# Altium PCB LDOTEST.PcbDoc
Units mil, origin at the board's own origin, x right, y up, seen from the top; angles counter-clockwise.
Board outline 6000 x 4000 mil, 2 copper layers (Top Layer, Bottom Layer); 44 components, 18 nets, 141 pads, 32 vias.
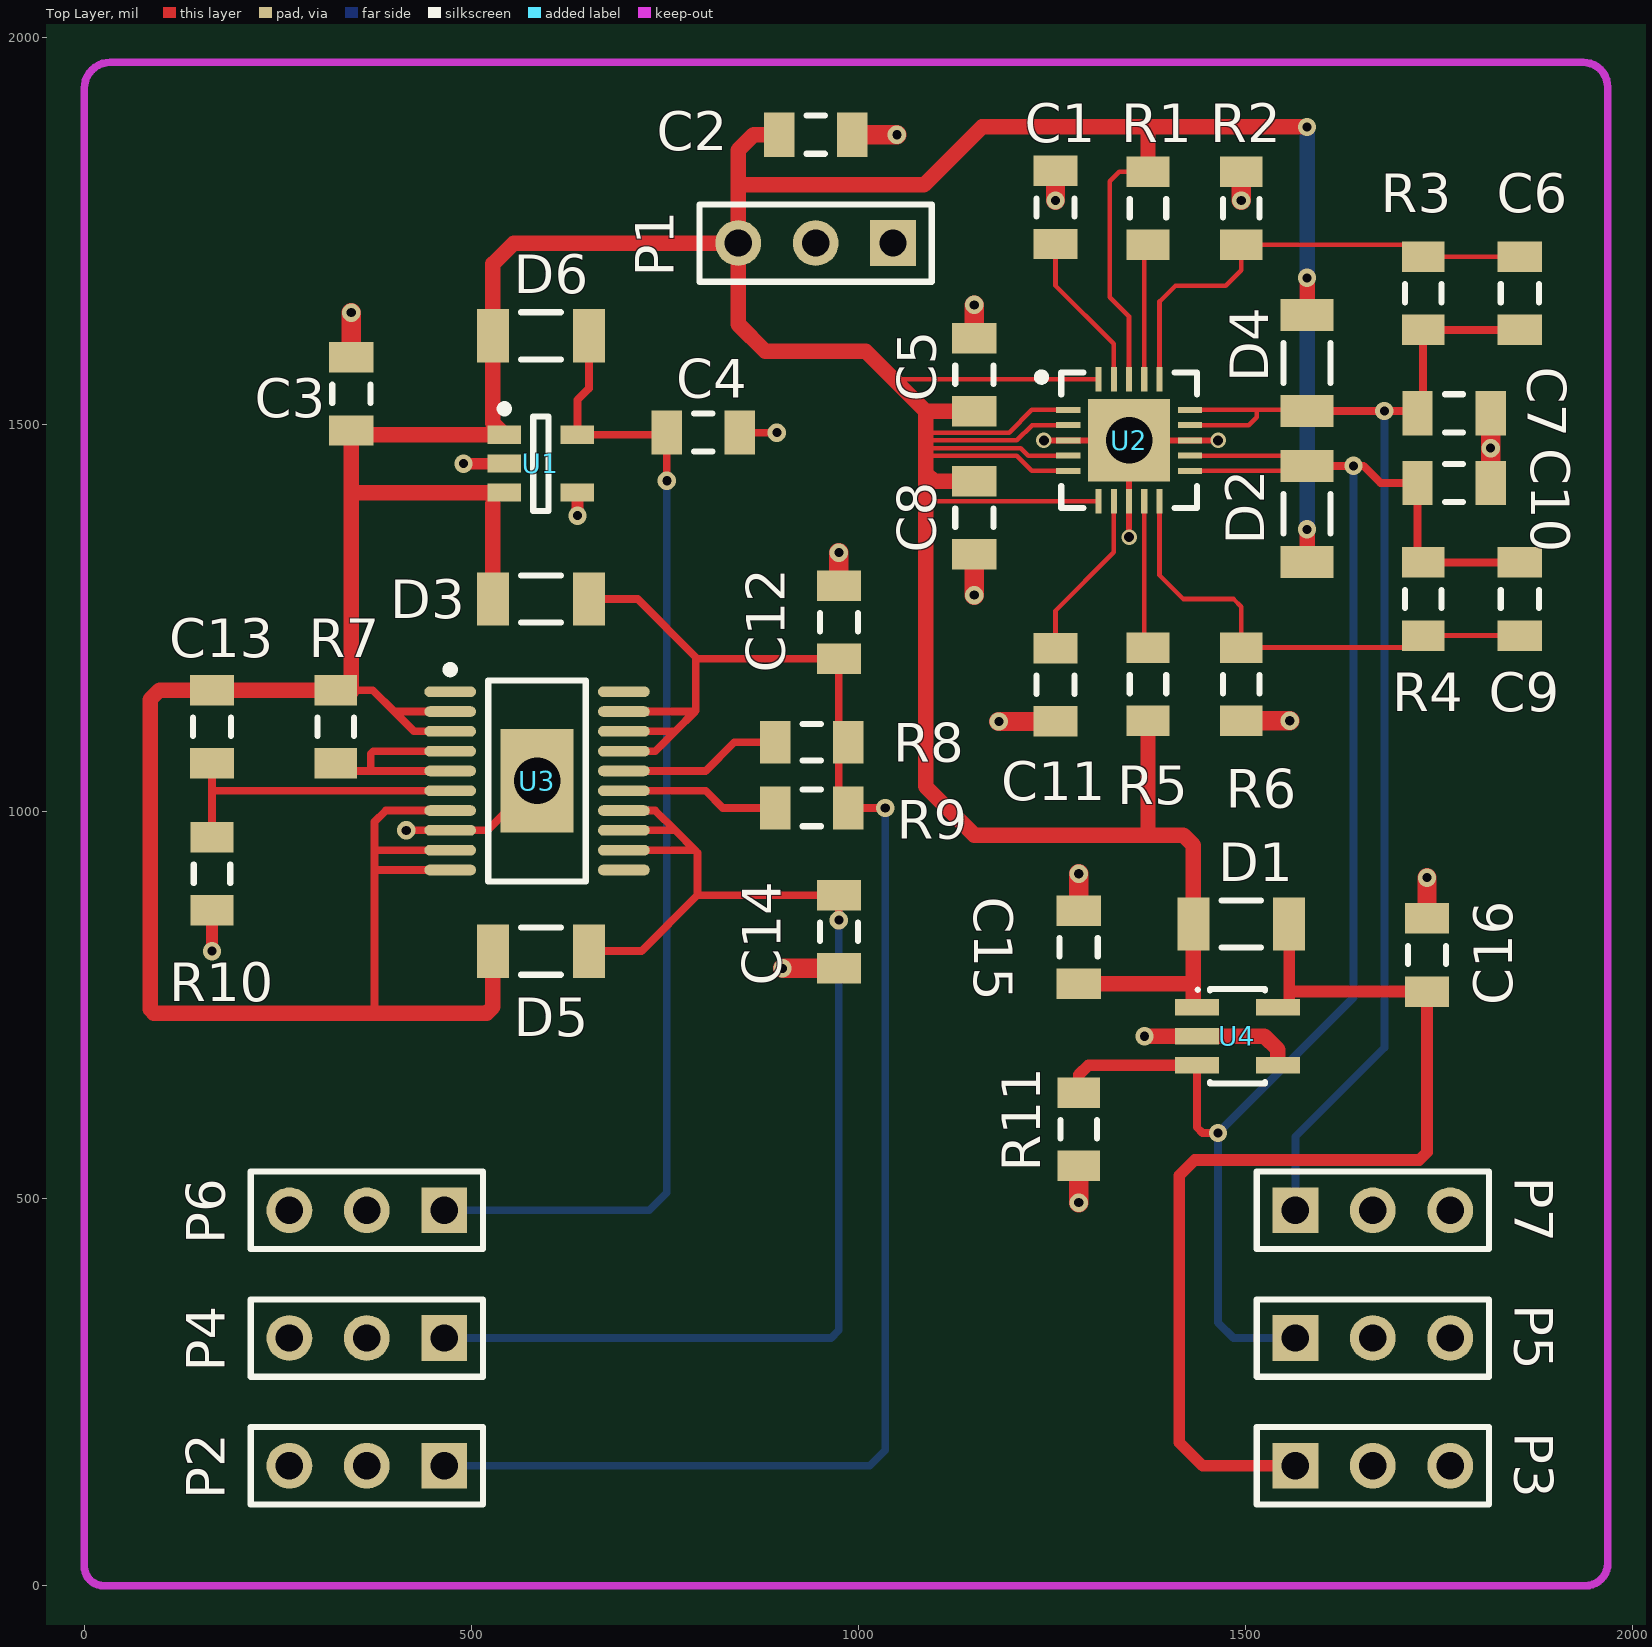
[diagram p0: Top Layer view]
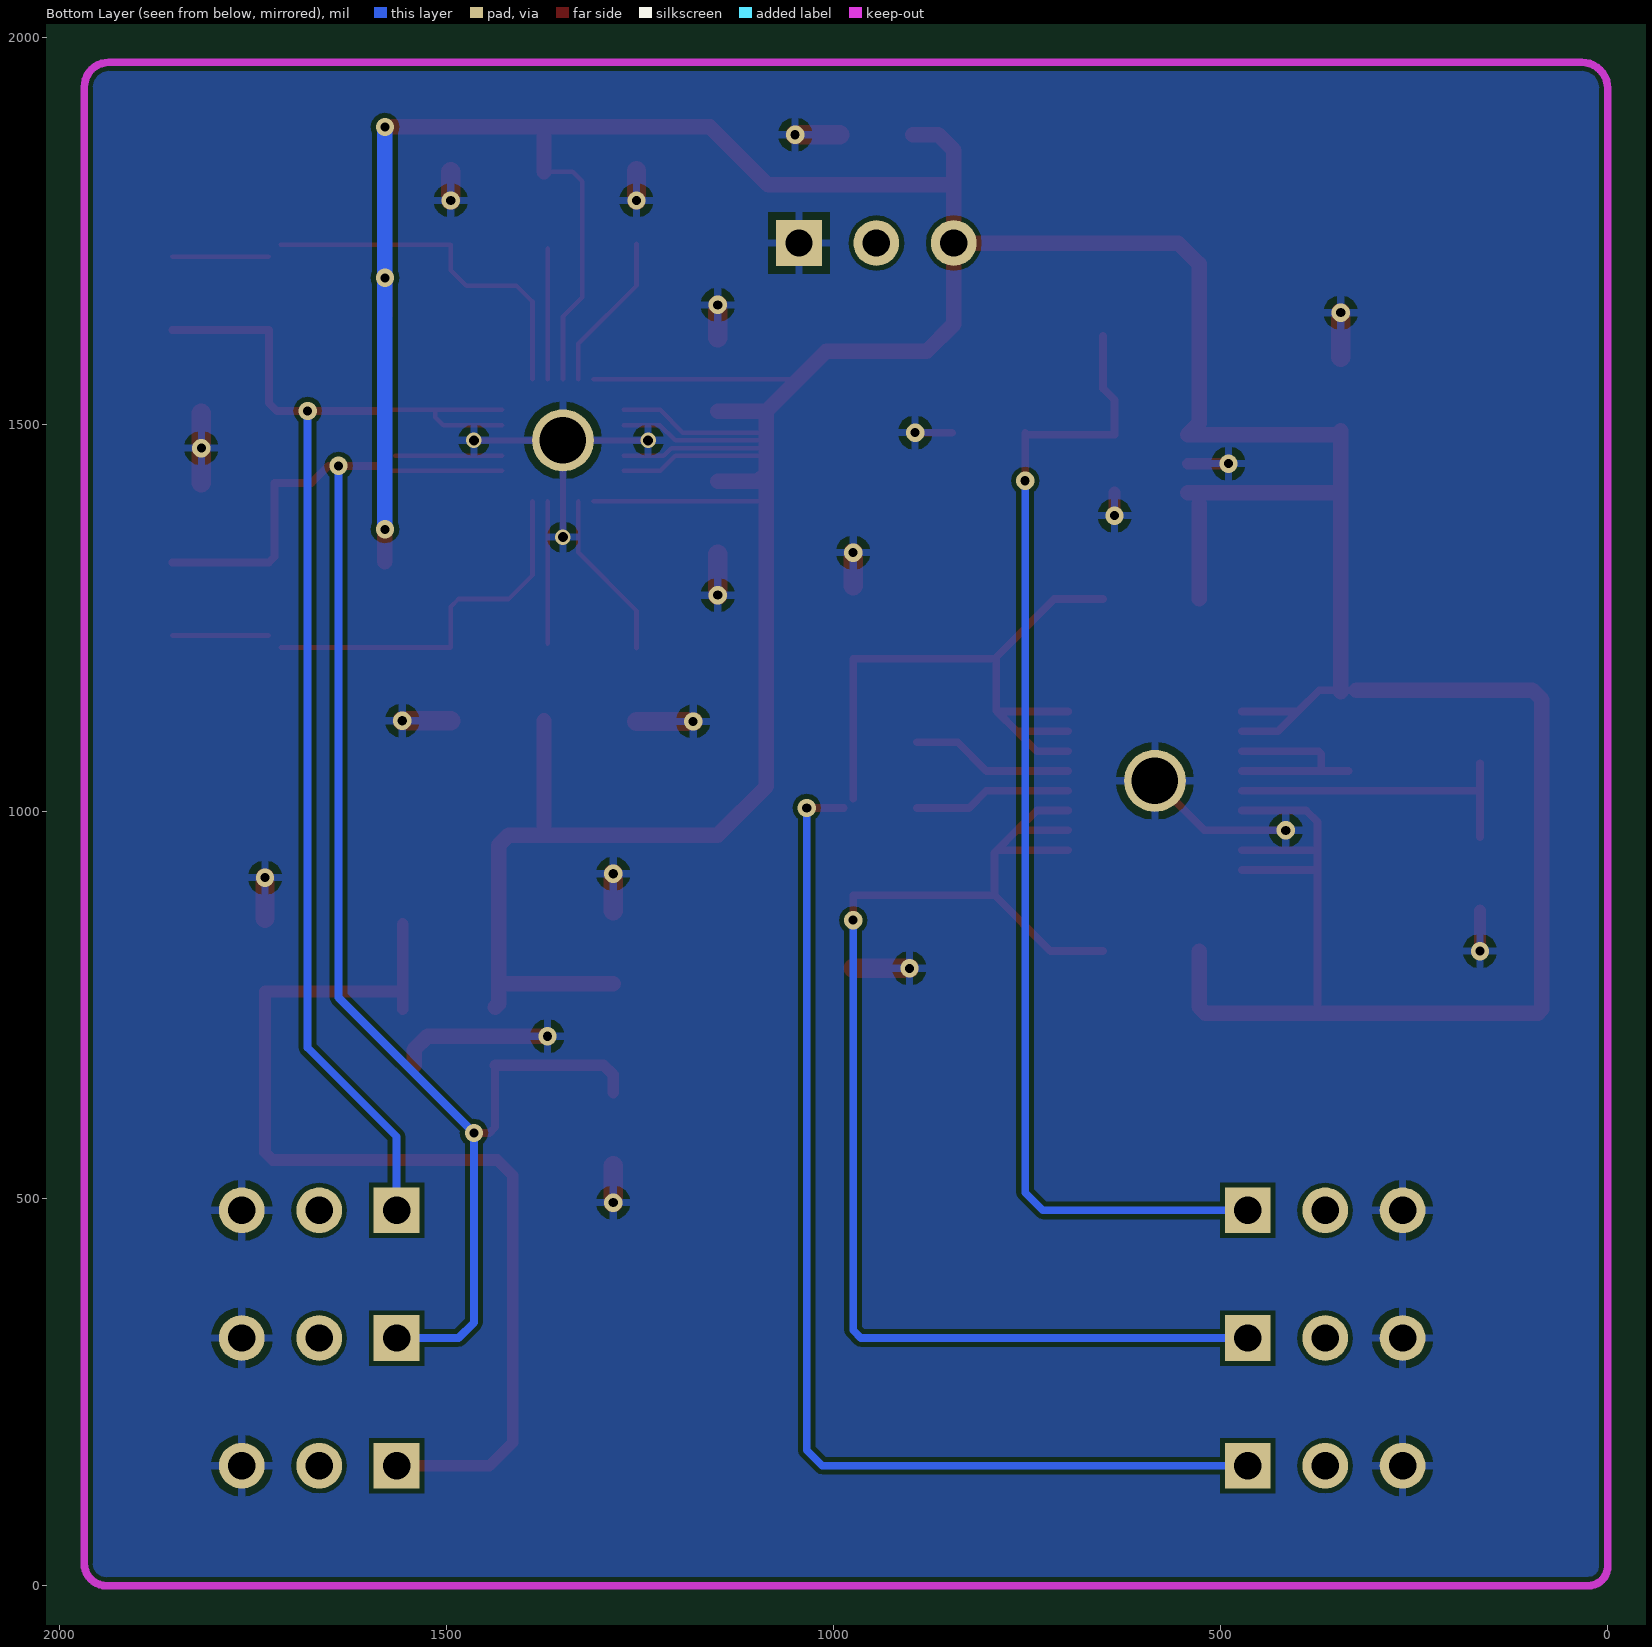
[diagram p1: Bottom Layer view, seen from below]

## Layer stack, top to bottom
Top Layer: signal copper 1.4
Dielectric: dielectric 12.6, FR-4, Dk 4.8
Bottom Layer: signal copper 1.4

## Board outline
-2215,-605 3785,-605 3785,3395 -2215,3395

## Design rules (kind name [scope] priority, off if disabled: settings)
Clearance [All] p1: gap=6
PolygonConnect [All] p1: connectstyle=Relief reliefconductorwidth=10 reliefentries=4 polygonreliefangle="90 Angle" airgapwidth=10
RoutingVias [All] p1: holewidth=28 width=50 viastyle="Through Hole" minholewidth=28 minwidth=50 maxholewidth=28 maxwidth=50
SolderMaskExpansion [All] p1: expansion=4
Width [All] p1: maxlimit=50 minlimit=6 preferedwidth=10 minimp=50.000000 maximp=50.000000 favimp=50.000000
28 further rules are at their usual default settings.

## Components (designator, comment, footprint, x,y, rotation, side; value= is the part's Value field where it differs from the comment)
C1 "Cap" C2012 1255,1780.98 r90 top
C2 "Cap" C2012 945,1875 r0 top
C3 "Cap" C2012 345,1540 r270 top
C4 "Cap" C2012 800,1490 r0 top
C5 "Cap" C2012 1150,1565 r90 top
C6 "Cap" C2012 1855,1670 r270 top
C7 "Cap" C2012 1770,1515 r0 top
C8 "Cap" C2012 1150,1380 r270 top
C9 "Cap" C2012 1855,1275 r270 top
C10 "Cap" C2012 1770,1425 r0 top
C11 "Cap" C2012 1255,1164.02 r270 top
C12 "Cap" C2012 975,1245 r90 top
C13 "Cap" C2012 165,1110 r270 top
C14 "Cap" C2012 975,845 r270 top
C15 "Cap" C2012 1285,825 r270 top
C16 "Cap" C2012 1735,815 r90 top
D1 "SK34" 1206 1495,855 r180 top
D2 "SK34" 1206 1580,1385 r270 top
D3 "SK34" 1206 590,1275 r180 top
D4 "SK34" 1206 1580,1580 r90 top
D5 "SK34" 1206 590,820 r180 top
D6 "SK34" 1206 590,1615 r180 top
P1 "Header 3" HDR1X3 1045,1735 r180 top
P2 "Header 3" HDR1X3 465,155 r180 top
P3 "Header 3" HDR1X3 1565,155 r0 top
P4 "Header 3" HDR1X3 465,320 r180 top
P5 "Header 3" HDR1X3 1565,320 r0 top
P6 "Header 3" HDR1X3 465,485 r180 top
P7 "Header 3" HDR1X3 1565,485 r0 top
R1 "Res" R2012 1374.51,1780 r270 top
R2 "Res" R2012 1495,1780 r270 top
R3 "Res" R2012 1730,1670 r270 top
R4 "Res" R2012 1730,1275 r270 top
R5 "Res" R2012 1374.51,1165 r270 top
R6 "Res" R2012 1495,1165 r270 top
R7 "Res" R2012 325,1110 r90 top
R8 "Res" R2012 940,1090 r180 top
R9 "Res" R2012 940,1005 r180 top
R10 "Res" R2012 165,920 r270 top
R11 "Res" R2012 1285,590 r270 top
U1 "TLV71210" TLV712 590,1450 r0 top
U2 "TPS7A88(7)" TPS7A88(7) 1350,1480 r0 top
U3 "TPS70151" TPS701 585,1040 r0 top
U4 "TLV70233" SOT-23-5 1490,710 r270 top

## Footprints (in the part's own frame and the unit in brackets; to place one, negate y for a bottom-side part, rotate by r counter-clockwise, add the part's x,y. Pads: shape width x height; smd on the part's side, far side on the other; paste and mask are expansions set on the pad)
1206 [mm]
  rect 1.05x1.75 smd: 1(-1.575,0) 2(1.575,0)
  silkscreen extent -0.65,-0.77 0.65,0.77, body extent -1.6,-0.8 1.6,0.8, height 1.6
C2012 [mm] "Chip Capacitor, 2-Leads, Body 2.0x1.2mm, IPC Low Density"
  rect 1x1.45 smd: 1(-1.2,0) 2(1.2,0)
  silkscreen extent -0.3,-0.63 0.3,0.63, body extent -0.98,-0.6 1.02,0.6, height 0.5
HDR1X3 [mm] "Connector; Header; 3 Position"
  rect 1.5x1.5 hole 0.9: 1(0,0)
  round 1.5 hole 0.9: 2(2.54,0) 3(5.08,0)
  silkscreen extent -1.27,-1.27 6.35,1.27, body extent -1.27,-1.27 6.35,1.27, height 7.58
R2012 [mm] "Chip Resistor, 2-Leads, Body 2.0x1.2mm, IPC Low Density"
  rect 1x1.4 smd: 1(-1.2,0) 2(1.2,0)
  silkscreen extent -0.3,-0.6 0.3,0.6, body extent -0.98,-0.6 1.02,0.6, height 0.5
SOT-23-5 [mm] "SOT-23/SC-74A; 5 Leads; Body 3.1 x 3 mm, inc. leads (LxW max)"
  rect 0.55x1.45 smd: 1(-0.95,-1.329) 2(0,-1.329) 3(0.95,-1.329) 4(0.95,1.329) 5(-0.95,1.329)
  silkscreen extent -1.57,-1.35 1.55,0.9
TLV712 [mm] "SOT23, 5-Leads, Body 2.90x2.80mm, Pitch 0.95mm, IPC Medium Density"
  rect 1.1x0.6 smd: 1(-1.2,0.95) 2(-1.2,0) 3(-1.2,-0.95) 4(1.2,-0.95) 5(1.2,0.95)
  silkscreen extent -1.32,-1.55 0.25,1.92, body extent -0.87,-1.52 0.87,1.53, height 1.45
TPS7A88(7) [mm] "QFN, 20-Leads, Body 4.00x4.00mm, Pitch 0.50mm, Thermal Pad 2.70x2.70mm, IPC Medium Density"
  rect 0.8x0.2 smd: 1(-2,1) 2(-2,0.5) 3(-2,0) 4(-2,-0.5) 5(-2,-1) 11(2,-1) 12(2,-0.5) 13(2,0) 14(2,0.5) 15(2,1)
  rect 0.2x0.8 smd: 6(-1,-2) 7(-0.5,-2) 8(0,-2) 9(0.5,-2) 10(1,-2) 16(1,2) 17(0.5,2) 18(0,2) 19(-0.5,2) 20(-1,2)
  rect 2.7x2.7 smd: 21(0,0)
  silkscreen extent -3,-2.22 2.22,2.23, body extent -2.08,-2.07 2.07,2.08, height 0.8
TPS701 [mm] "TSOP, 20-Leads, Body 6.50x4.40mm, Pitch 0.65mm, Thermal Pad 3.40.2x2.40.2mm, IPC Medium Density"
  oval 1.7x0.35 smd: 1(-2.85,2.925) 2(-2.85,2.275) 3(-2.85,1.625) 4(-2.85,0.975) 5(-2.85,0.325) 6(-2.85,-0.325) 7(-2.85,-0.975) 8(-2.85,-1.625) 9(-2.85,-2.275) 10(-2.85,-2.925) 11(2.85,-2.925) 12(2.85,-2.275) 13(2.85,-1.625) 14(2.85,-0.975) 15(2.85,-0.325) 16(2.85,0.325) 17(2.85,0.975) 18(2.85,1.625) 19(2.85,2.275) 20(2.85,2.925)
  rect 2.4x3.4 smd: 21(0,0)
  silkscreen extent -2.97,-3.3 1.6,3.77, body extent -2.25,-3.3 2.25,3.3, height 1.2

## Part data
C1 C2 C3 C4 C5 C6 C7 C8 C9 C10 C11 C12 C13 C14 C15 C16: "贴片电容"
D1 D2 D3 D4 D5 D6: library part "Diode 1N4148", "High Conductance Fast Diode"
P1 P2 P3 P4 P5 P6 P7: "Header, 3-Pin"
R1 R2 R3 R4 R5 R6 R7 R8 R9 R10 R11: "贴片电阻"
U1: library part TLV712
U3: library part TPS701
U4: library part MIC5219, "LDO"

## Free pads (board coordinates)
  round 80 hole 60: 0(1350,1480) 1(585,1040)

## Via types
v1: diameter 23.74, hole 11.81, Top Layer to Bottom Layer, tented both sides, 29 vias
v2: diameter 20, hole 13, Top Layer to Bottom Layer, tented both sides, 3 vias

## Nets (pads, with @x,y where several pads share a name; then routed paths per layer and width w, separated by ;. In a path a pad name is that pad's centre, name@x,y a point inside that pad or via, vN(x,y) a via of type N, cw(c..) or ccw(c..) an arc to the next point about the centre after c; other vN are vias at no path point)
1.0V_1: C4.1 D6.1 P6.1 U1.5 | length 1529.7
  Top Layer w10: D6.1 652.01,1547.01 637.24,1532.24 U1.5 750.16,1487.4 C4.1 v1(752.76,1427.76)
  Bottom Layer w10: P6.1 730,485 752.76,507.76 v1(752.76,1427.76)
1.0V_2: C6.2 C7.1 D4.1 P7.1 R3.2 U2.14 U2.15 | length 1704.2
  Top Layer w6: U2.14 1504.69,1499.69 1515,1510 1515,1519.37 ; U2.15 1515,1519.37 ; D4.1@1578.62,1519.37 1515,1519.37
  Top Layer w10: D4.1 1719.76,1517.99 1730,1528.23 R3.2 C6.2
  Bottom Layer w10: P7.1 1565,580 1680,695 v1(1680,1517.99)
1.8V_1: C14.1 D5.1 P4.1 U3.12 U3.13 U3.14 | length 1760
  Top Layer w10: D5.1 720,820 792.24,892.24 ; U3.12 789.06,950.43 ; U3.13 763.46,976.02 ; U3.14 737.87,1001.61 763.46,976.02 ; v1(975,860) C14.1 792.24,892.24 ; 763.46,976.02 789.06,950.43 ; 789.06,950.43 792.24,947.24 792.24,892.24
  Bottom Layer w10: P4.1 965,320 975,330 v1(975,860)
1.8V_2: C9.1 C10.1 D2.1 P5.1 R4.1 R11.1 U2.11 U2.12 U4.3 | length 2244.5
  Top Layer w6: U2.11 D2.1@1573.62,1440.63 ; U2.12 D2.1@1566.69,1460.32
  Top Layer w10: U4.3 1437.68,592.32 1445,585 v1(1465,585) ; D2.1 1652.99,1447.01 1675,1425 C10.1 1722.76,1329.49 R4.1 C9.1
  Top Layer w15: R11.1 1285,660 1297.6,672.6 U4.3
  Bottom Layer w10: P5.1 1485,320 1465,340 v1(1465,585) 1640,760 v1(1640,1447.01)
3.3V_1: C12.1 D3.1 P2.1 R8.1 R9.1 U3.17 U3.18 U3.19 | length 2331.3
  Top Layer w10: D3.1 715,1275 792.24,1197.76 C12.1 R9.1@975,1017.24 ; U3.17 737.87,1078.39 763.46,1103.98 ; U3.18 763.46,1103.98 ; U3.19 789.06,1129.57 ; 790,1197.76 790,1130.51 789.06,1129.57 ; R9.1 v1(1035,1005) ; 763.46,1103.98 789.06,1129.57
  Bottom Layer w10: P2.1 1015,155 1035,175 v1(1035,1005)
3.3V_2: C16.1 D1.1 P3.1 U4.5 | length 1328.4
  Top Layer w15: U4.5@1557.01,745 D1.1 ; 1564.25,767.76 C16.1 1735,560 1725,550 1435,550 1415,530 1415,185 1445,155 P3.1
5V: C2.1 C3.2 C5.1 C8.1 C13.1 C15.2 D1.2 D2.2 D3.2 D4.2 D5.2 D6.2 P1.3 R1.1 R5.2 R7.2 U1.1 U1.3 U2.1 U2.2 U2.4 U2.5 U2.6 U2.18 U2.20 U3.2 U3.3 U3.7 U3.9 U3.10 U4.1 | length 8425.4
  Top Layer w6: 1050.98,1558.74 U2.20 ; 1087.24,1460 1205,1460 1224.37,1440.63 U2.5 ; 1087.24,1480 1205,1480 1224.69,1499.69 U2.2 ; 1087.24,1495 1092.24,1490 1195,1490 1224.37,1519.37 U2.1 ; 1088.5,1401.26 U2.6 ; 1097.24,1470 1210,1470 1219.69,1460.32 U2.4 ; U2.18 1350,1640 1325,1665 1325,1815 1337.24,1827.24 R1.1
  Top Layer w10: R7.2 345,1157.24 372.76,1157.24 400.43,1129.57 ; 375,740 375,987.24 389.37,1001.61 U3.7 ; 375.16,924.84 U3.10 ; 375.43,950.43 U3.9 ; U3.3 426.02,1103.98 400.43,1129.57 ; U3.2 400.43,1129.57
  Top Layer w20: R7.2 C13.1 97.24,1157.24 85,1145 85,745 90,740 375,740 520,740 527.99,747.99 D5.2 ; R7.2@345,1155 345,1157.24 345,1412.6 ; C3.2 345,1412.6 ; C3.2@350.35,1487.4 U1.1 527.99,1502.17 D6.2 527.99,1707.99 555,1735 P1.3 ; D3.2 527.99,1397.83 ; U1.3 345,1412.6 ; C2.1 865,1875 845,1855 845,1810 ; C8.1 1097.76,1427.24 1087.24,1437.76 ; C5.1 1087.24,1517.76 ; C15.2 1430.24,777.76 ; 1374.51,970.49 R5.2 ; R1.1 1374.51,1882.99 ; U4.1 1432.99,752.09 D1.2 1432.99,957.01 1420,970 1150,970 1087.24,1032.76 1087.24,1437.76 ; D2.2 v1(1580,1365) ; D4.2 v1(1580,1690) ; v1(1580,1885) 1160,1885 1085,1810 845,1810 ; P1.3 845,1810 ; P1.3 845,1630 880,1595 1010,1595 1087.24,1517.76 ; 1087.24,1437.76 1087.24,1460 1087.24,1480 1087.24,1495 1087.24,1517.76
  Bottom Layer w20: v1(1580,1365) v1(1580,1690) v1(1580,1885)
EN: C13.2 R10.1 U3.6 | length 401.1
  Top Layer w10: R10.1 C13.2 ; 167.2,1027.2 U3.6
FB1: C6.1 R2.2 R3.1 U2.16 | length 600.3
  Top Layer w6: U2.16 1389.37,1659.37 1410,1680 1475,1680 1495,1700 R2.2 R3.1@1714.49,1732.76 ; R3.1 C6.1
FB2: C9.2 R4.2 R6.1 U2.10 | length 615.3
  Top Layer w6: U2.10 1389.37,1305.63 1420,1275 1485,1275 1495,1265 R6.1 R4.2@1714.49,1212.24 ; R4.2 C9.2
GND: C1.2 C2.2 C3.1 C4.2 C5.2 C7.2 C8.2 C10.2 C11.2 C12.2 C14.2 C15.1 C16.2 P1.1 P2.3 P3.3 P4.3 P5.3 P6.3 P7.3 pad.0 pad.1 R2.1 R6.2 R10.2 R11.2 U1.2 U1.4 U2.3 U2.8 U2.13 U2.21 U3.8 U3.21 U4.2 U4.4 | length 1704.4
  Top Layer w8: v2(1240,1480) U2.3 U2.21 ; v2(1350,1355) U2.8 U2.21 ; v2(1465,1480) U2.13 U2.21
  Top Layer w10: v1(416.02,976.02) U3.8 521.02,976.02 U3.21 ; C4.2 v1(895,1490)
  Top Layer w15: v1(165,820) R10.2 ; v1(490,1450) U1.2 ; v1(637.24,1382.76) U1.4
  Top Layer w20: v1(1370,710) U4.2 1525,710 1542.32,692.68 U4.4
  Top Layer w25: C3.1 v1(345,1645) ; v1(902.24,797.76) C14.2 ; C12.2 v1(975,1335) ; C2.2 v1(1050,1875) ; v1(1150,1280) C8.2 ; C5.2 v1(1150,1655) ; v1(1181.77,1116.77) C11.2 ; v1(1255,1790) C1.2 ; v1(1285,495) R11.2 ; C15.1 v1(1285,920) ; R6.2 v1(1557.76,1117.76) ; v1(1495,1790) R2.1 ; C16.2 v1(1735,915) ; C10.2 C7.2
  other v1: 1817.24,1470
NetC1_1: C1.1 U2.19 | length 206.2
  Top Layer w6: C1.1 1255,1680 1330.31,1604.69 U2.19
NetC11_1: C11.1 U2.7 | length 221.2
  Top Layer w6: C11.1 1255,1260 1330.31,1335.31 U2.7
NetR1_2: R1.2 U2.17 | length 169.2
  Top Layer w6: U2.17 R1.2@1369.69,1727.93
NetR5_1: R5.1 U2.9 | length 184.2
  Top Layer w6: R5.1@1369.69,1217.07 U2.9
NetR7_1: R7.1 U3.4 U3.5 | length 264.2
  Top Layer w10: R7.1@334.96,1052.8 370,1052.8 ; U3.5 370,1052.8 ; U3.4 373.39,1078.39 370,1075 370,1052.8
NetR8_2: R8.2 U3.16 | length 211
  Top Layer w10: U3.16 802.8,1052.8 840,1090 R8.2
NetR9_2: R9.2 U3.15 | length 204.7
  Top Layer w10: U3.15 802.8,1027.2 825,1005 R9.2
pads on no net: P1.2 P2.2 P3.2 P4.2 P5.2 P6.2 P7.2 U3.1 U3.11 U3.20

## Polygon pours and split planes (outlines as drawn)
GND on Bottom Layer "Bottom-3.3V" (solid, remove dead copper, pour order 2): 135,1968.5 133.5,1970 0,1970 0,1915 0,25 0,0 60,0 1895,0 1940,0 1965,0 1968.5,3.5 1968.5,55 1968.5,1963.5 1970,1965 1966.5,1968.5 1925,1968.5

## Keep-outs
Keep-Out Layer:
  lines w10: 0,25 ccw(c25,25) 25,0 1940,0 ccw(c1940,28.5) 1968.5,28.5 1968.5,1936.5 ccw(c1936.5,1936.5) 1936.5,1968.5 33.5,1968.5 ccw(c33.5,1935) 0,1935 0,25